# Altium PCB CAN-Test-Board.PcbDoc
Units mil, origin at the board's own origin, x right, y up, seen from the top; angles counter-clockwise.
Board outline 3425 x 3570 mil, 2 copper layers (Top Layer, Bottom Layer); 28 components, 26 nets, 155 pads, 35 vias.
Unrouted connection lines stored in the file: 32.
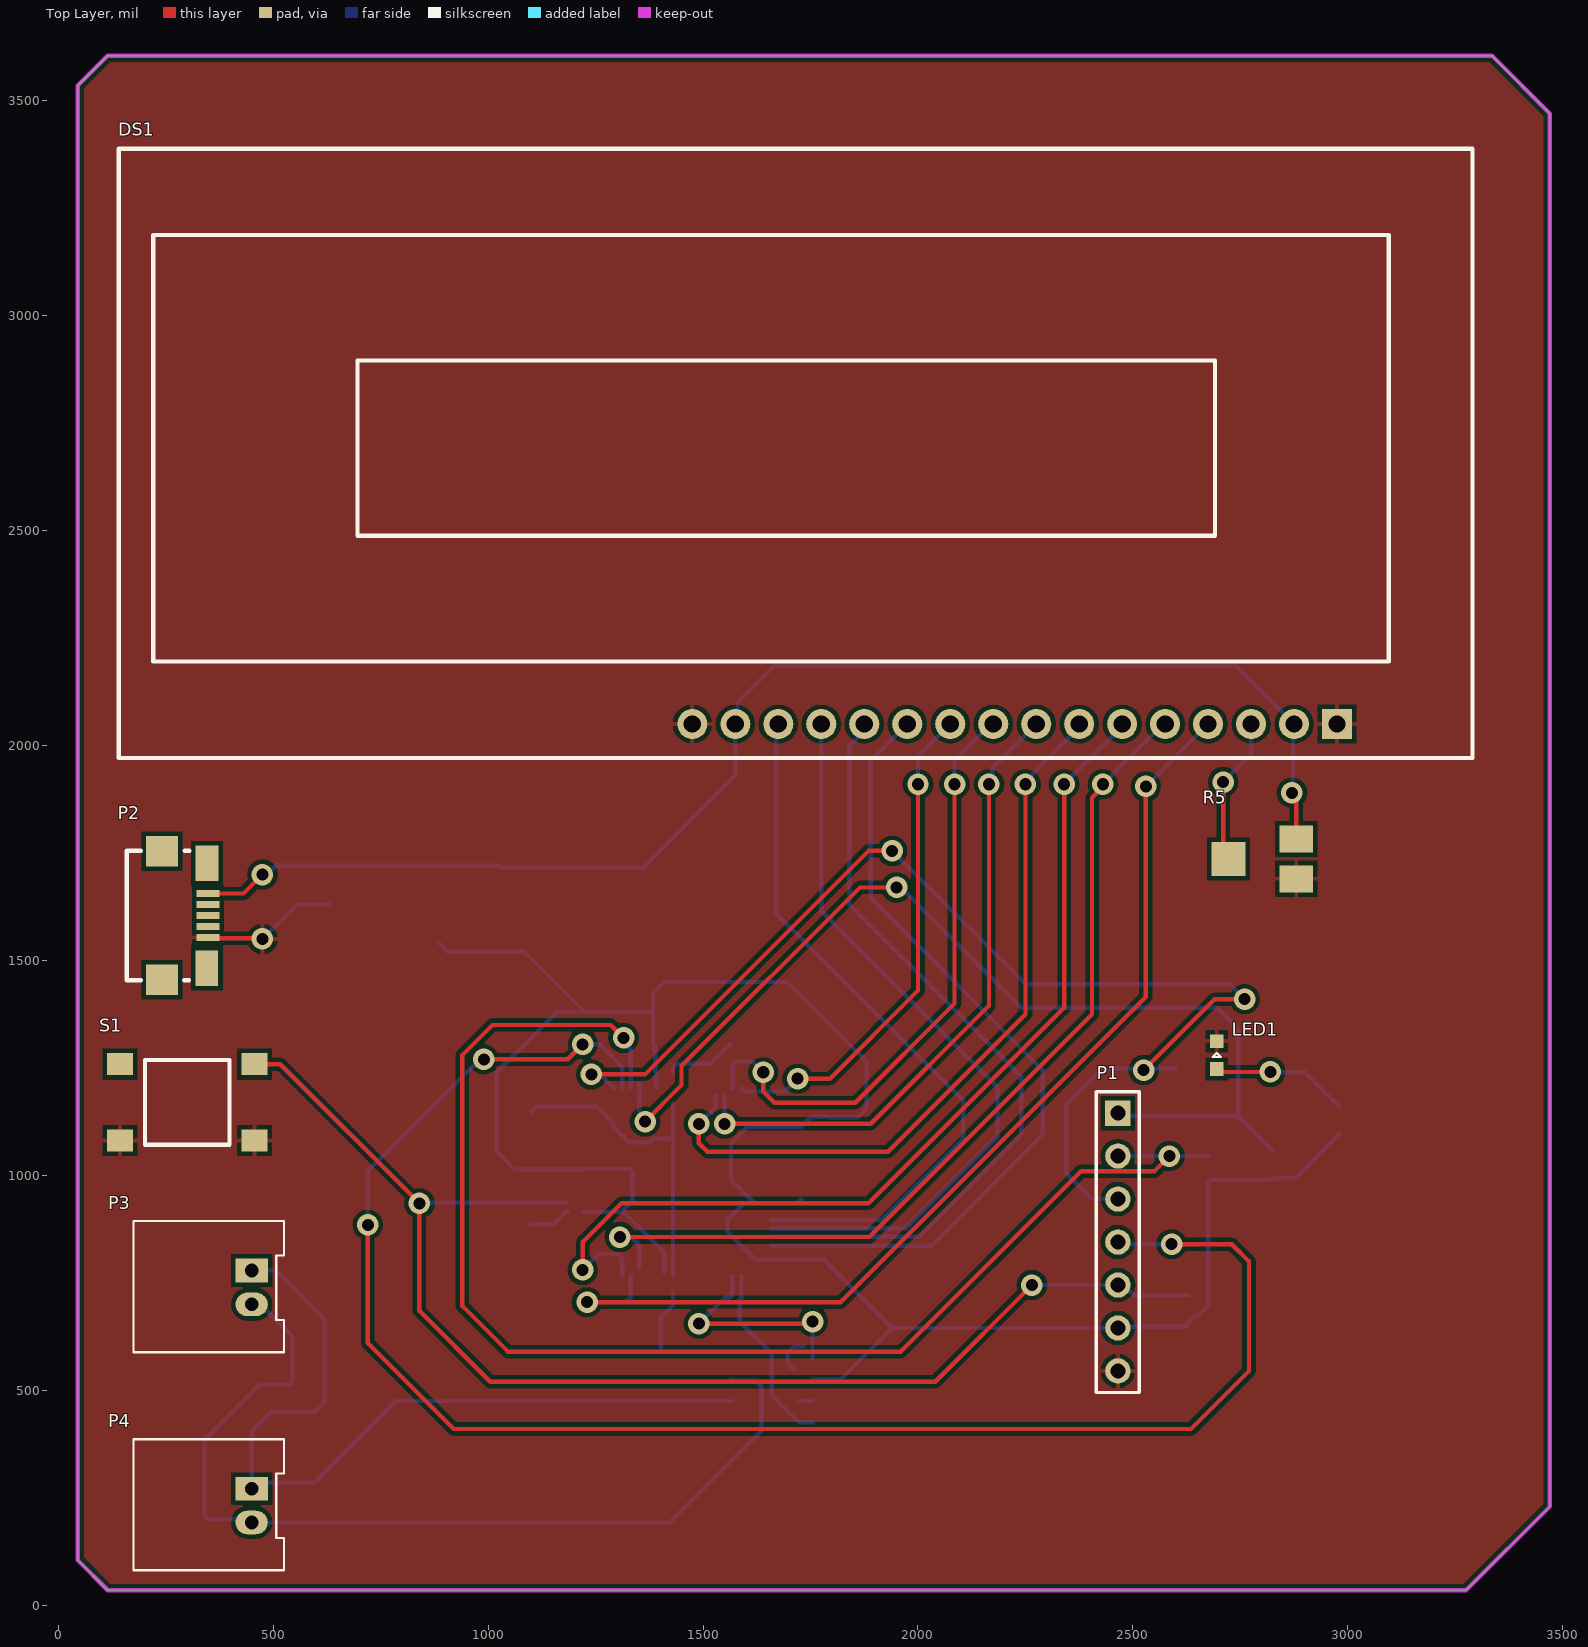
[diagram p0: Top Layer view]
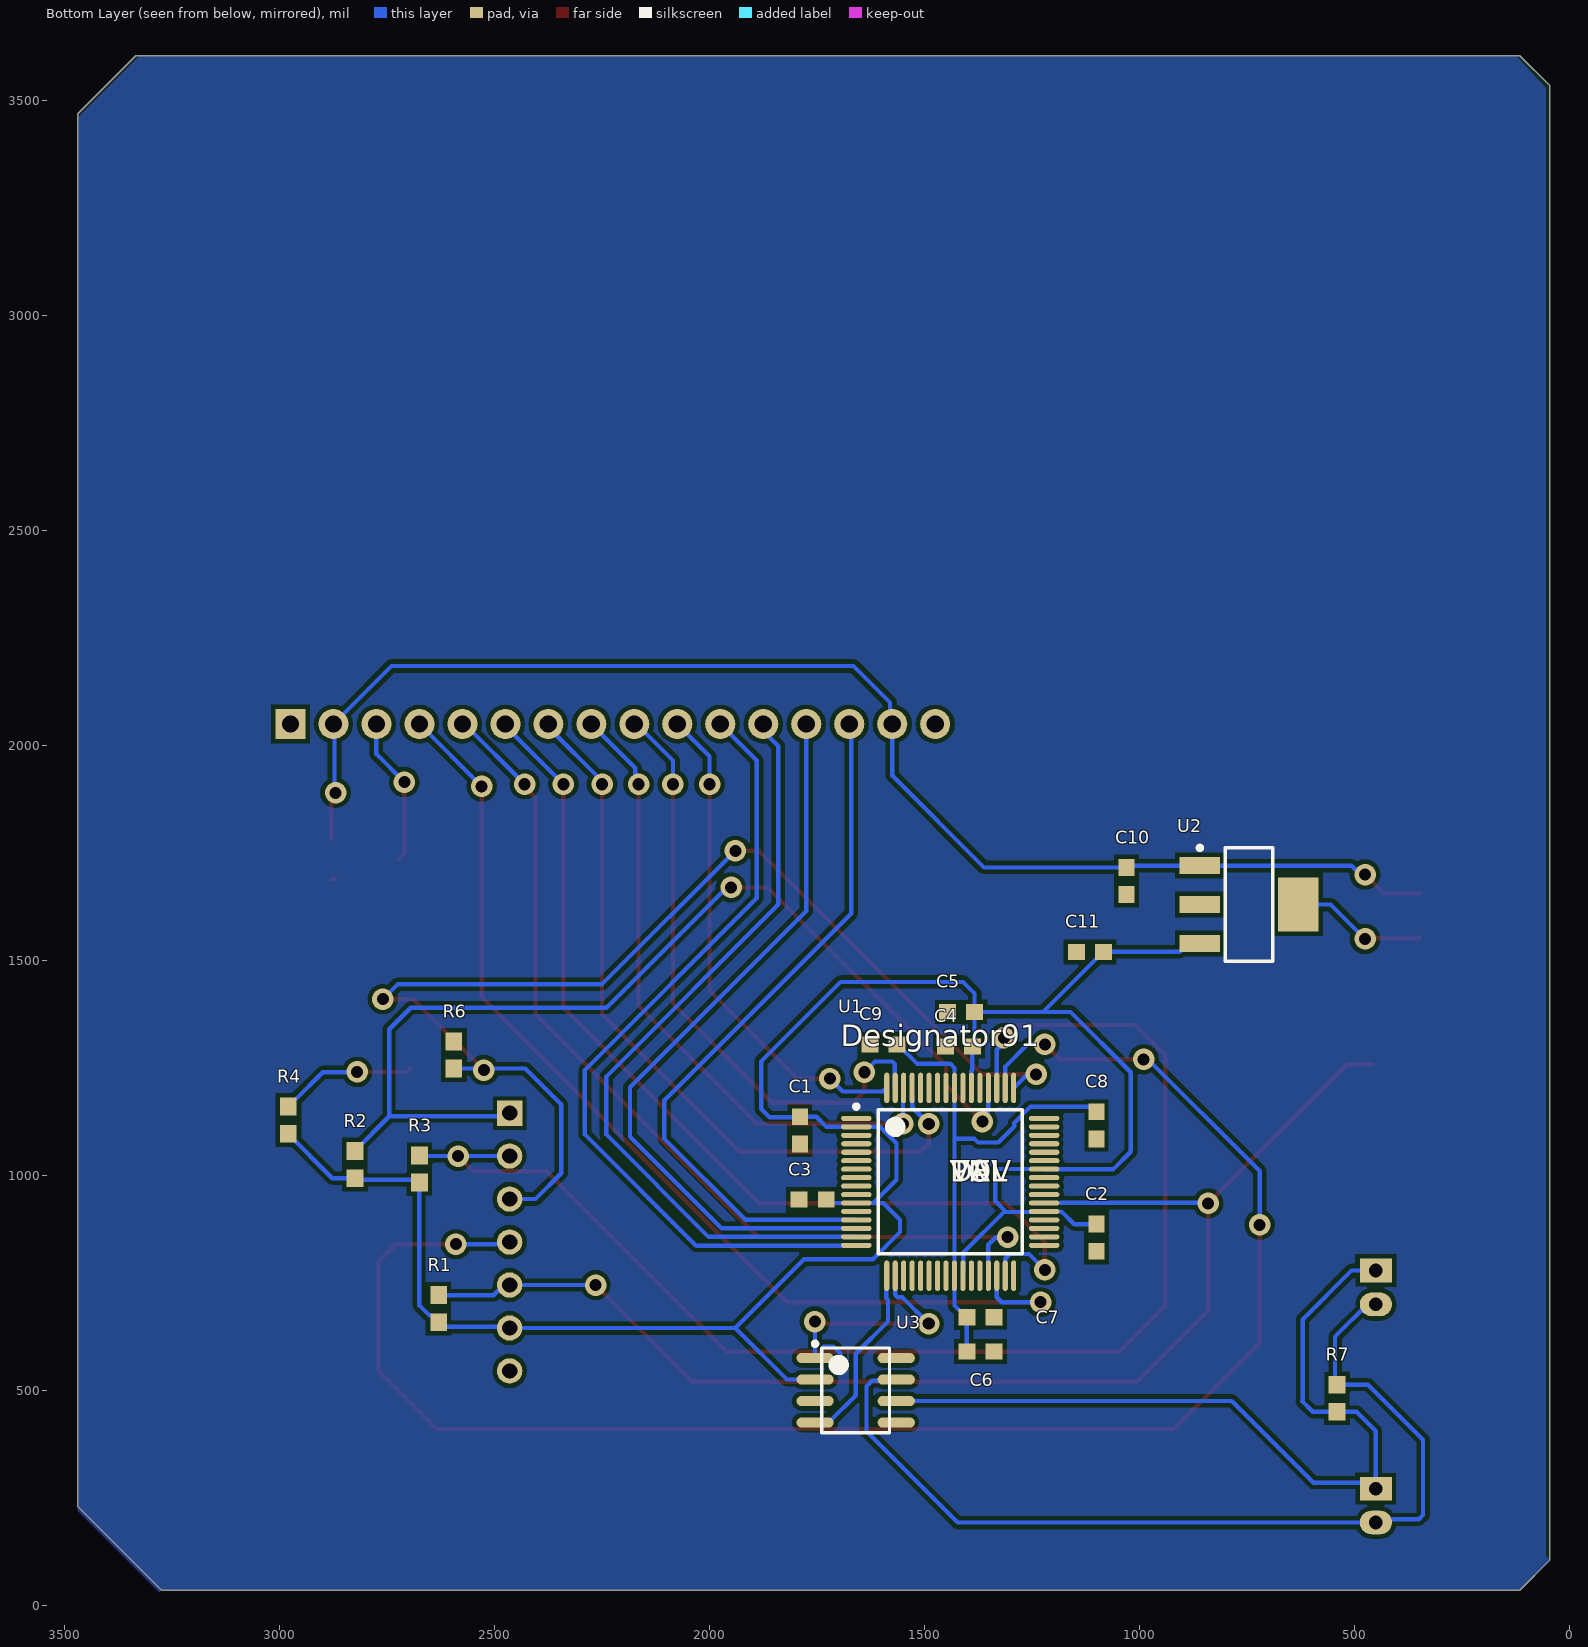
[diagram p1: Bottom Layer view, seen from below]

## Layer stack, top to bottom
Top Solder: solder mask 0.4, Solder Resist, Dk 3.5
Top Layer: signal copper 1.4
Dielectric 1: dielectric 12.6, FR-4, Dk 4.8
Bottom Layer: signal copper 1.4
Bottom Solder: solder mask 0.4, Solder Resist, Dk 3.5

## Board outline
45,105 45,3535 115,3605 3335,3605 3470,3470 3470,230 3275,35 115,35

## Design rules (kind name [scope] priority, off if disabled: settings)
Clearance [All] p1: gap=10 ignorepadtopadclearanceinfootprint=FALSE except(0: Arc-Hole Track-Hole SMDPad-Hole THPad-Hole Via-Hole Fill-Hole Poly-Hole Region-Hole Text-Hole)
PolygonConnect [All] p1: connectstyle=Relief reliefconductorwidth=10 reliefentries=4 polygonreliefangle="90 Angle" airgapwidth=10
RoutingVias [All] p1: holewidth=28 width=50 viastyle="Through Hole" minholewidth=28 minwidth=50 maxholewidth=28 maxwidth=50
SolderMaskExpansion [All] p1: expansion=4 istentingtop=FALSE
Width [All] p1: maxlimit=10 minlimit=10 preferedwidth=10
30 further rules are at their usual default settings.

## Components (designator, comment, footprint, x,y, rotation, side; value= is the part's Value field where it differs from the comment)
C1 "Cap" CAPC0603 1790,1105 r270 bottom value=0.1uF
C2 "Cap" CAPC0603 1100,855 r270 bottom value=0.1uF
C3 "Cap" CAPC0603 1760,943.5 r0 bottom value=0.1uF
C4 "Cap" CAPC0603 1420,1300 r0 bottom value=0.1uF
C5 "Cap" CAPC0603 1415,1380 r0 bottom value=2.0uF
C6 "Cap" CAPC0603 1370,590 r180 bottom value=0.1uF
C7 "Cap" CAPC0603 1370,670 r180 bottom value=0.1uF
C8 "Cap" CAPC0603 1100,1116.5 r270 bottom value=1.0uF
C9 "Cap" CAPC0603 1595,1305 r0 bottom value=2.2uF
C10 "Cap" CAPC0603 1030,1685 r270 bottom value=1uF
C11 "Cap" CAPC0603 1115,1520 r0 bottom value=1uF
DS1 "LCD 44780" "OLED 16x2" 2975,2050 r180 top
LED1 "LED" LED0603 2695,1280 r90 top
P1 "Header 7" HDR1X7 2465,1145 r270 top
P2 "USB Micro" 10118192-0001LF 369,1604.41 r270 top
P3 "2-pin Horz Sherlock" MOLEX-HDR-1X2-SHERLOCK-HORZ 449.8,778.74 r90 top
P4 "2-pin Horz Sherlock" MOLEX-HDR-1X2-SHERLOCK-HORZ 449.8,271.26 r90 top
R1 "Res" RES0603 2630,690 r90 bottom value=10k
R2 "Res" RES0603 2825,1025 r90 bottom value=10k
R3 "Res" RES0603 2675,1015 r90 bottom value=10k
R4 "Res" RES0603 2980,1128.5 r90 bottom value=1k
R5 "Pot" ST4ETA103 2801.26,1736.26 r90 top value=10k
R6 "Res" RES0603 2595,1280 r90 bottom value=10k
R7 "Res" RES0603 540,481.5 r90 bottom value=120
S1 "Button" PTS645xxxxSMTR92 300,1170 r0 top
U1 "" PM0064A_N 1440,985 r180 bottom value=Value
U2 "3.3V LDO Reg" SOT23-4n 745,1630 r180 bottom
U3 "Comment" SOIC-8pin 1660,500 r180 bottom

## Footprints (in the part's own frame and the unit in brackets; to place one, negate y for a bottom-side part, rotate by r counter-clockwise, add the part's x,y. Pads: shape width x height; smd on the part's side, far side on the other; paste and mask are expansions set on the pad)
10118192-0001LF [mm] "USB Micro-B Recepticle"
  rect 0.4x1.35 smd: 1(-1.3,-0.533) 2(-0.65,-0.533) 3(0,-0.533) 4(0.65,-0.533) 5(1.3,-0.533)
  rect 1.8x1.9 smd: SHD(-3.8,-3.248) SHD(3.8,-3.248)
  rect 2.1x1.35 smd: SHD(-3.1,-0.584) SHD(3.1,-0.598)
  silkscreen extent -3.83,-5.33 3.83,-1.63, body extent -3.96,-5.98 3.96,-0.32, height 3.09
CAPC0603 [mm] "Chip Capacitor, 2-Leads, Body 1.60x0.80mm, IPC Medium Density"
  rect 1x0.95 smd: 1(-0.8,0) 2(0.8,0)
  body extent -0.88,-0.48 0.87,0.48, height 0.8
HDR1X7 [mm] "Connector; Header; 7 Position"
  rect 1.5x1.5 hole 0.9: 1(0,0)
  round 1.5 hole 0.9: 2(2.54,0) 3(5.08,0) 4(7.62,0) 5(10.16,0) 6(12.7,0) 7(15.24,0)
  silkscreen extent -1.27,-1.27 16.51,1.27
LED0603 [mm] "Chip LED, 2-Leads, Body 1.60x0.80mm, IPC Medium Density"
  rect 0.8x0.8 smd: A(-0.825,0) C(0.825,0)
  silkscreen extent -0.13,-0.25 0.12,0.25, body extent -0.88,-0.48 0.87,0.47, height 0.8
MOLEX-HDR-1X2-SHERLOCK-HORZ [mm]
  rect 1.397x1.905 hole 0.8: 1(0,0)
  oval 1.397x1.905 hole 0.8: 2(-2,0)
  silkscreen extent -4.83,-1.91 2.92,6.98, body extent -4.83,-1.91 2.87,8.59, height 5.54
"OLED 16x2" [mil]
  rect 70x70 hole 40: 1(0,0)
  round 70 hole 40: 2(100,0) 3(200,0) 4(300,0) 5(400,0) 6(500,0) 7(600,0) 8(700,0) 9(800,0) 10(900,0) 11(1000,0) 12(1100,0) 13(1200,0) 14(1300,0) 15(1400,0) 16(1500,0)
  silkscreen extent -315,-1339 2835,79
PM0064A_N [mm]
  oval 1.8x0.3 smd paste-0.102 mask+0.051: 1(-5.55,3.75) 2(-5.55,3.25) 3(-5.55,2.75) 4(-5.55,2.25) 5(-5.55,1.75) 6(-5.55,1.25) 7(-5.55,0.75) 8(-5.55,0.25) 9(-5.55,-0.25) 10(-5.55,-0.75) 11(-5.55,-1.25) 12(-5.55,-1.75) 13(-5.55,-2.25) 14(-5.55,-2.75) 15(-5.55,-3.25) 16(-5.55,-3.75) 33(5.55,-3.75) 34(5.55,-3.25) 35(5.55,-2.75) 36(5.55,-2.25) 37(5.55,-1.75) 38(5.55,-1.25) 39(5.55,-0.75) 40(5.55,-0.25) 41(5.55,0.25) 42(5.55,0.75) 43(5.55,1.25) 44(5.55,1.75) 45(5.55,2.25) 46(5.55,2.75) 47(5.55,3.25) 48(5.55,3.75)
  oval 0.3x1.8 smd paste-0.102 mask+0.051: 17(-3.75,-5.55) 18(-3.25,-5.55) 19(-2.75,-5.55) 20(-2.25,-5.55) 21(-1.75,-5.55) 22(-1.25,-5.55) 23(-0.75,-5.55) 24(-0.25,-5.55) 25(0.25,-5.55) 26(0.75,-5.55) 27(1.25,-5.55) 28(1.75,-5.55) 29(2.25,-5.55) 30(2.75,-5.55) 31(3.25,-5.55) 32(3.75,-5.55) 49(3.75,5.55) 50(3.25,5.55) 51(2.75,5.55) 52(2.25,5.55) 53(1.75,5.55) 54(1.25,5.55) 55(0.75,5.55) 56(0.25,5.55) 57(-0.25,5.55) 58(-0.75,5.55) 59(-1.25,5.55) 60(-1.75,5.55) 61(-2.25,5.55) 62(-2.75,5.55) 63(-3.25,5.55) 64(-3.75,5.55)
  silkscreen extent -5.68,-4.25 4.25,4.57, body extent -4.19,-4.19 4.19,4.19, height 0.64
PTS645xxxxSMTR92 [mm] "PTS645 Series SMT 6 mm Tactile Switch"
  rect 1.555x1.3 smd: A(-3.975,2.25) A(3.975,2.25) B(-3.975,-2.25) B(3.975,-2.25)
  silkscreen extent -2.5,-2.5 2.5,2.5, body extent -3,-3 3,3, height 4.5
RES0603 [mm] "Chip Resistor, 2-Leads, Body 1.60x0.80mm, IPC Medium Density"
  rect 1.05x1 smd: 1(-0.8,0) 2(0.8,0)
  body extent -0.88,-0.48 0.87,0.47, height 0.8
SOIC-8pin [mm] "For 296-1345-1-ND"
  oval 2.2x0.6 smd: 1(-2.4,1.905) 2(-2.4,0.635) 3(-2.4,-0.635) 4(-2.4,-1.905) 5(2.4,-1.905) 6(2.4,-0.635) 7(2.4,0.635) 8(2.4,1.905)
  silkscreen extent -2.53,-2.5 2,2.88, body extent -2,-2.5 2,2.5, height 1.75
SOT23-4n [mm] "SOT223, 4-Leads, Body 6.50x7.00mm (avg), Pitch 2.30mm, IPC Medium Density"
  rect 2.4x1 smd: 1(-2.9,2.3) 2(-2.9,0) 3(-2.9,-2.3)
  rect 2.4x3.2 smd: 4(2.9,0)
  silkscreen extent -3.03,-3.35 1.4,3.47, body extent -1.85,-3.35 1.85,3.35, height 1.7
ST4ETA103 [mm] "TRIMMER 10K OHM 0.25W SMD"
  rect 1.6x2 smd: 1(-1.175,-2) 2(1.175,-2)
  rect 2x2 smd: 3(0,2)
  body extent -2.5,-2.3 2.5,2.3, height 2.3

## Part data
C1 C2 C3 C4 C5 C6 C7 C8 C9 C10 C11: Supplier Part Number 1=1276-1000-1-ND, Supplier 1=Digi-Key
LED1: Color=Green, Supplier Part Number 1=754-1122-1-ND, Supplier 1=Digi-Key
P1: "Header, 7-Pin", LatestRevisionDate=17-Jul-2002, LatestRevisionNote="Re-released for DXP Platform.", Publisher="Altium Limited"
P2: "USB Mini B Metal Shield SMT", Supplier Part Number 1=609-4613-1-ND, Supplier 1=Digi-Key
P3 P4: library part MOLEX-HDR-1x2-SHERLOCK_RA, "Header, Molex, 2mm Pitch Sherlock Header, Single Row, Horizontal, 2 Circuits, Length 3.3mm,  0353630260", Manufacturer="Molex Inc", Manufacturer Part Number=0353630260, Supplier Part Number 1=WM18931-ND, Supplier 1=Digi-Key
R1 R2 R3 R4 R6 R7: Supplier Part Number 1=RMCF0603JT10K0CT-ND, Supplier 1=Digi-Key
R5: library part Potentiometer, "Potentiometer", Supplier Part Number 1=ST4ETA103CT-ND, Supplier 1=Digi-Key
S1: "SPST Button", Supplier Part Number 1=CKN9087CT-ND, Supplier 1=Digi-Key
U1: library part TM4C123GH6PMT7R, "Imported", Alternate_PartNumber=TM4C123GH6PMT, Manufacturer="Texas Instruments", PartNumber=TM4C123GH6PMTR, CompType=IC, MountType=SMT, PackageReference=PM0064A, PIN_COUNT=64, RefDes=RefDes, RoHS=Y, TYPE=TYPE
U2: library part TLV1117LV, "IC REG LDO 3.3V 1A SOT223", Supplier Part Number 1=LM3940IMPX-3.3/NOPBCT-ND, Supplier 1=Digi-Key
U3: library part SN65HVD230, "3.3V CAN Bus Transceiver"

## Via types
v1: diameter 50, hole 28, Top Layer to Bottom Layer, 35 vias

## Nets (pads, with @x,y where several pads share a name; then routed paths per layer and width w, separated by ;. In a path a pad name is that pad's centre, name@x,y a point inside that pad or via, vN(x,y) a via of type N, cw(c..) or ccw(c..) an arc to the next point about the centre after c; other vN are vias at no path point)
+5: C10.1 DS1.2 DS1.15 P2.1 R5.2 U2.1 | length 3175.9
  Top Layer w10: P2.1 430.59,1655.59 v1(475,1700) ; v1(2870,1890) 2880,1880 R5.2
  Bottom Layer w10: v1(475,1700) 485.82,1700 506.38,1720.55 U2.1 1025.94,1720.55 C10.1 1361.5,1716.5 1575,1930 DS1.15 1580,2055 1580,2100 1665,2185 2740,2185 DS1.2 2872.5,2047.5 2872.5,1892.5 v1(2870,1890)
CAN1_RX: U1.17 U3.4 | length 431.7
  Bottom Layer w10: U1.17@1588.86,766.5 1588.86,714.57 1585,710.71 1585,660 1660,585 1660,487.99 1722.99,425 U3.4
CAN1_TX: U1.18 U3.1 | length 512.8
  Top Layer w10: v1(1490,655) 1750,655 v1(1755,660)
  Bottom Layer w10: v1(1490,655) 1551.28,716.28 1562.15,716.28 1568,722.14 U1.18 ; U3.1 v1@1754.49,670.51
CANH: P3.2 P4.2 R7.2 U3.7 | length 2238.8
  Bottom Layer w10: P3.2 470,700 545,625 545,517.99 R7.2 467.99,512.99 340,385 340,210 350,200 442.32,200 P4.2 1422.52,192.52 1635,405 1635,509.14 1621.75,522.39 1568.12,522.39 U3.7
CANL: P3.1 P4.1 R7.1 U3.6 | length 1941.9
  Bottom Layer w10: P3.1 506.26,778.74 620,665 620,475 620.86,474.14 596.72,450 R7.1 495,450 449.8,404.8 P4.1 463.54,285 595,285 785,475 U3.6
GND: C1.2 C2.2 C3.2 C4.2 C5.2 C6.2 C7.2 C8.2 C9.2 C10.2 C11.2 DS1.1 DS1.16 LED1.C P1.7 P2.5 R5.1 R6.2 S1.B U1.3 U1.12 U1.27 U1.32 U1.34 U1.35 U1.39 U1.40 U1.55 U2.2 U2.4 U3.3 U3.8 | length 458.9
  Top Layer w10: P2.5 349.61,1551.61 473.39,1551.61 v1(475,1550) ; R5.1@2872.13,1690 R5.1
  Bottom Layer w10: v1(475,1550) 555,1630 U2.4 ; DS1.16@1470,2055 DS1.16 ; 1711.06,549.01 1696.18,563.89 1696.18,586.11 1711.89,601.81 1734.49,601.81 ; U3.3@1722.99,475 U3.3 ; P1.7@2460,540 P1.7
LCD_D0: DS1.7 U1.61 | length 1753.6
  Top Layer w10: v1(1490,1120) 1490,1075 1510,1055 1930,1055 2250,1375 v1(2250,1910)
  Bottom Layer w10: v1(1490,1120) 1528.58,1158.58 U1.61@1528.58,1185 ; v1(2250,1910) 2250,1917.5 2375,2042.5 DS1.7
LCD_D1: DS1.8 U1.62 | length 1496.2
  Top Layer w10: v1(1550,1120) 1890,1120 2165,1395 v1(2165,1910) v1@2166.72,1910
  Bottom Layer w10: v1(1550,1120) U1.62@1550,1185 ; v1(2165,1910) 2172.65,1917.65 2172.65,1947.65 DS1.8
LCD_D2: DS1.9 U1.63 | length 1441.6
  Top Layer w10: v1(1640,1240) 1640,1195 1665.86,1169.14 1854.14,1169.14 2085,1400 v1(2085,1910)
  Bottom Layer w10: U1.63 1569.17,1204.72 1569.17,1259.14 1575.03,1265 1615,1265 v1(1640,1240) ; v1(2085,1910) 2085,1965 2170,2050 DS1.9 DS1.9@2164.18,2039.18
LCD_D3: DS1.10 U1.64 | length 1162.8
  Top Layer w10: v1(1720,1225) 1795,1225 2000,1430 v1(2000,1910)
  Bottom Layer w10: U1.64@1589.17,1203.5 1597.68,1195 1690,1195 v1(1720,1225) ; v1(2000,1910) 2000,1975 DS1.10
LCD_D4: DS1.11 U1.16 | length 1894.6
  Bottom Layer w10: U1.16@1658.5,836.14 2031.14,836.14 2290,1095 2290,1245 1890,1645 1890,1965 DS1.11
LCD_D5: DS1.12 U1.15 | length 1815.2
  Bottom Layer w10: U1.15 2002.05,857.05 2240,1095 2240,1230 1840,1630 1840,1998.98 1875,2033.98 DS1.12
LCD_D6: DS1.13 U1.14 | length 1755.1
  Bottom Layer w10: U1.14@1658.5,877.05 1972.05,877.05 2185,1090 2185,1205 1775,1615 DS1.13 DS1.13@1767.5,2042.5
LCD_D7: DS1.14 U1.13 | length 1671.6
  Bottom Layer w10: U1.13@1658.5,897.05 1917.05,897.05 2105,1085 2105,1175 1670,1610 1670,2045 DS1.14
LCD_En: DS1.6 U1.31 | length 2278
  Top Layer w10: v1(1220,780) 1220,845 1310,935 1885,935 2340,1390 v1(2340,1910)
  Bottom Layer w10: v1(1220,780) 1256.93,816.93 1301.02,816.93 1312.05,805.9 U1.31 ; v1(2340,1910) 2475,2045 DS1.6
LCD_R/W: DS1.5 U1.29 | length 2167.3
  Top Layer w10: v1(1306.63,856.53) 1886.53,856.53 2405,1375 2405,1878.43 2430,1903.43 v1(2430,1910)
  Bottom Layer w10: v1(1306.63,856.53) 1308.17,855 1335,855 1351.42,838.58 U1.29@1351.42,785 ; v1(2430,1910) 2570,2050 DS1.5
LCD_RS: DS1.4 U1.30 | length 2445.5
  Top Layer w10: v1(1230,705) 1820,705 2530,1415 v1(2530,1905)
  Bottom Layer w10: v1(1230,705) 1320,705 1331.73,716.73 U1.30 ; v1(2530,1905) DS1.4
NetLED1_A: LED1.A R4.2 | length 324.7
  Top Layer w10: LED1.A@2697.48,1250 LED1.A 2701.74,1240.78 v1(2819.65,1240.78)
  Bottom Layer w10: v1@2820,1240 2900,1240 2964.33,1175.67 2965.31,1175.67 2980,1160.98 R4.2
RST_N: P1.5 R1.2 S1.A U1.38 | length 3072.4
  Top Layer w10: S1.A@456.5,1258.58 516.42,1258.58 v1(840,935) 840,685 1005,520 2040,520 v1(2265,745)
  Bottom Layer w10: v1(840,935) 841.18,936.18 1182.95,936.18 1183.03,936.1 ; v1(2265,745) P1.5 2478.27,745 2501.78,721.5 R1.2
TCK/SWCLK: P1.1 R2.2 U1.52 | length 2440
  Top Layer w10: v1(1365,1125) 1450,1210 1450,1255 1865,1670 v1(1950,1670)
  Bottom Layer w10: U1.52@1351.42,1215 U1.52 1351.42,1149.41 1365,1135.82 v1(1365,1125) ; v1@1970,1660 2240,1390 2695,1390 2745,1340 2745,1137.48 ; P1.1 2472.52,1137.48 2745,1137.48 ; R2.2 2825,1057.48 2745,1137.48
TDI: P1.4 U1.50 | length 3963.7
  Top Layer w10: v1(720,885) 720,610 920,410 2635,410 2770,545 2770,800 2730,840 v1(2590,840) ; v1(990,1270) 1185,1270 v1(1220,1305)
  Bottom Layer w10: v1(720,885) 720,1010 v1@995,1285 ; v1(1220,1305) 1260,1305 1311.73,1253.27 U1.50@1311.73,1203.5 ; P1.4 2470,840 v1(2590,840)
TDO/SWO: P1.3 R6.1 U1.49 | length 2841.4
  Top Layer w10: v1(1240,1235) 1365,1235 1885,1755 v1(1940,1755) ; v1(2525,1245) 2690,1410 v1(2760,1410)
  Bottom Layer w10: v1(1240,1235) 1260.87,1235 U1.49 ; v1(1940,1755) 2250,1445 2725,1445 v1(2760,1410) ; P1.3 2405,945 2345,1005 2345,1165 2428.5,1248.5 R6.1 R6.1@2598.5,1245
TMS/SWDIO: P1.2 R3.2 U1.51 | length 3211.9
  Top Layer w10: v1(1315,1320) 1285,1350 1010,1350 940,1280 940,695.86 1045.86,590 1960,590 2380,1010 2550,1010 v1(2585,1045)
  Bottom Layer w10: v1(1315,1320) 1315,1309.18 1331.73,1292.44 U1.51 ; P1.2 v1(2585,1045) 2673.5,1045 R3.2
VDD: C1.1 C2.1 C3.1 C4.1 C5.1 C11.1 P1.6 R1.1 R2.1 R3.1 R4.1 U1.2 U1.11 U1.26 U1.37 U1.42 U1.54 U2.3 U3.2 | length 5581.9
  Bottom Layer w10: U2.3@886.73,1539.45 906.18,1520 C11.1 1084.49,1520 1224.49,1380 ; C2.1 1151.5,886.5 1180,915 1182.39,915 1183.49,916.1 1184.93,916.1 ; U1.37 1222.72,914.88 1310.12,914.88 ; C4.1@1383.5,1295 C4.1 ; 1388.5,1244.62 C4.1 ; U1.54 1390.79,1242.33 ; U1.26@1410,775 1410,820 1315.12,914.88 1310.12,914.88 ; U1.2 1727.95,1112.95 1751.5,1136.5 C1.1 1791.5,1135 1860,1135 1880,1155 1880,1265 1695,1450 1410,1450 1383.5,1423.5 C5.1 ; U1.2@1658.5,1113.12 1603.12,1113.12 1565,1075 1565,990 1619.21,935.79 ; C3.1 1720.79,935.79 U1.11 1619.21,935.79 ; U3.2 1820,525 1940,645 ; R4.1 2980,1096.02 2877.48,993.5 R2.1 2821.5,990 2681.5,990 R3.1 2675,697.52 2651.65,674.17 2644.69,674.17 2625.31,654.8 2625.31,647.83 2467.83,647.83 P1.6 1940,645 ; 1224.49,1380 1160,1380 1020,1240 1020,1055 1060.47,1014.53 U1.42 1221.97,1015 1329.14,1015 1335,1009.14 1335,939.76 1310.12,914.88 ; 1224.49,1380 C5.1 ; C5.1 1383.5,1305 C4.1 ; 1619.21,935.79 1595.79,935.79 1556.64,896.64 1556.64,868.36 1620,805 1780,805 1940,645
VDDC: C6.1 C7.1 C8.1 C9.1 U1.25 U1.56 | length 1096.4
  Bottom Layer w10: C8.1 1112.01,1160 1253.23,1160 1290.83,1122.4 1290.83,1114.32 1328.43,1076.72 1375.15,1076.72 1383.44,1085 1430.16,1085 ; C6.1 C7.1 1402.48,670 1430,697.52 1430,729.5 1430.16,729.66 1430.16,729.93 ; 1430,1240.5 1430,1250 1440,1260 1517.52,1260 1562.52,1305 C9.1 ; U1.25 1430.16,1085 ; 1430.23,1166.74 1430,1166.51 1430,1155.86 1430.16,1155.7 1430.16,1085
VO: DS1.3 R5.3 | length 345.8
  Top Layer w10: v1(2710,1915) 2710,1748.78 R5.3
  Bottom Layer w10: v1(2710,1915) 2775,1980 DS1.3
pads on no net: P2.2 P2.3 P2.4 P2.SHD U1.1 U1.4 U1.5 U1.6 U1.7 U1.8 U1.9 U1.10 U1.19 U1.20 U1.21 U1.22 U1.23 U1.24 U1.28 U1.33 U1.36 U1.41 U1.43 U1.44 U1.45 U1.46 U1.47 U1.48 U1.53 U1.57 U1.58 U1.59 U1.60 U3.5

## Polygon pours and split planes (outlines as drawn)
GND on Top Layer "GND_L01_P001" (solid, pour order 1): 3275,35 3470,230 3470,3470 3335,3605 115,3605 45,3535 45,105 55,105 125,35
no net on Bottom Layer "NONET_L02_P005" (solid, pour order 5): 120,3600 125,3605 3325,3605 3470,3460 3470,220 3280,30 3275,35 115,35 45,105 55,115 55,3530
no net on Bottom Layer "NONET_L02_P004" (solid, pour order 4): 120,3600
no net on Bottom Layer "NONET_L02_P003" (solid, pour order 3): 4715,410

## Keep-outs
Top Layer:
  the board outline again, w10

## Other copper
Top Layer:
  region net RST_N: 840,935

## Text inside footprints (layer, text, board x,y; h text height)
U1: Bottom Overlay "DEV" at 1440,985 h50; Bottom Overlay "PN" at 1440,985 h50; Bottom Overlay "VAL" at 1440,985 h50; Bottom Overlay "TOL" at 1440,985 h50; Bottom Overlay "Designator91" at 1695,1300 h50